# Altium PCB 主板-双BH(1).PcbDoc (part 5 of 13)
Units mm, origin at the board's own origin, x right, y up, seen from the top; angles counter-clockwise.
Board outline 97.69 x 103.45 mm, 2 copper layers (Top Layer, Bottom Layer); 78 components, 75 nets, 243 pads, 279 vias.
Unrouted connection lines stored in the file: 7.
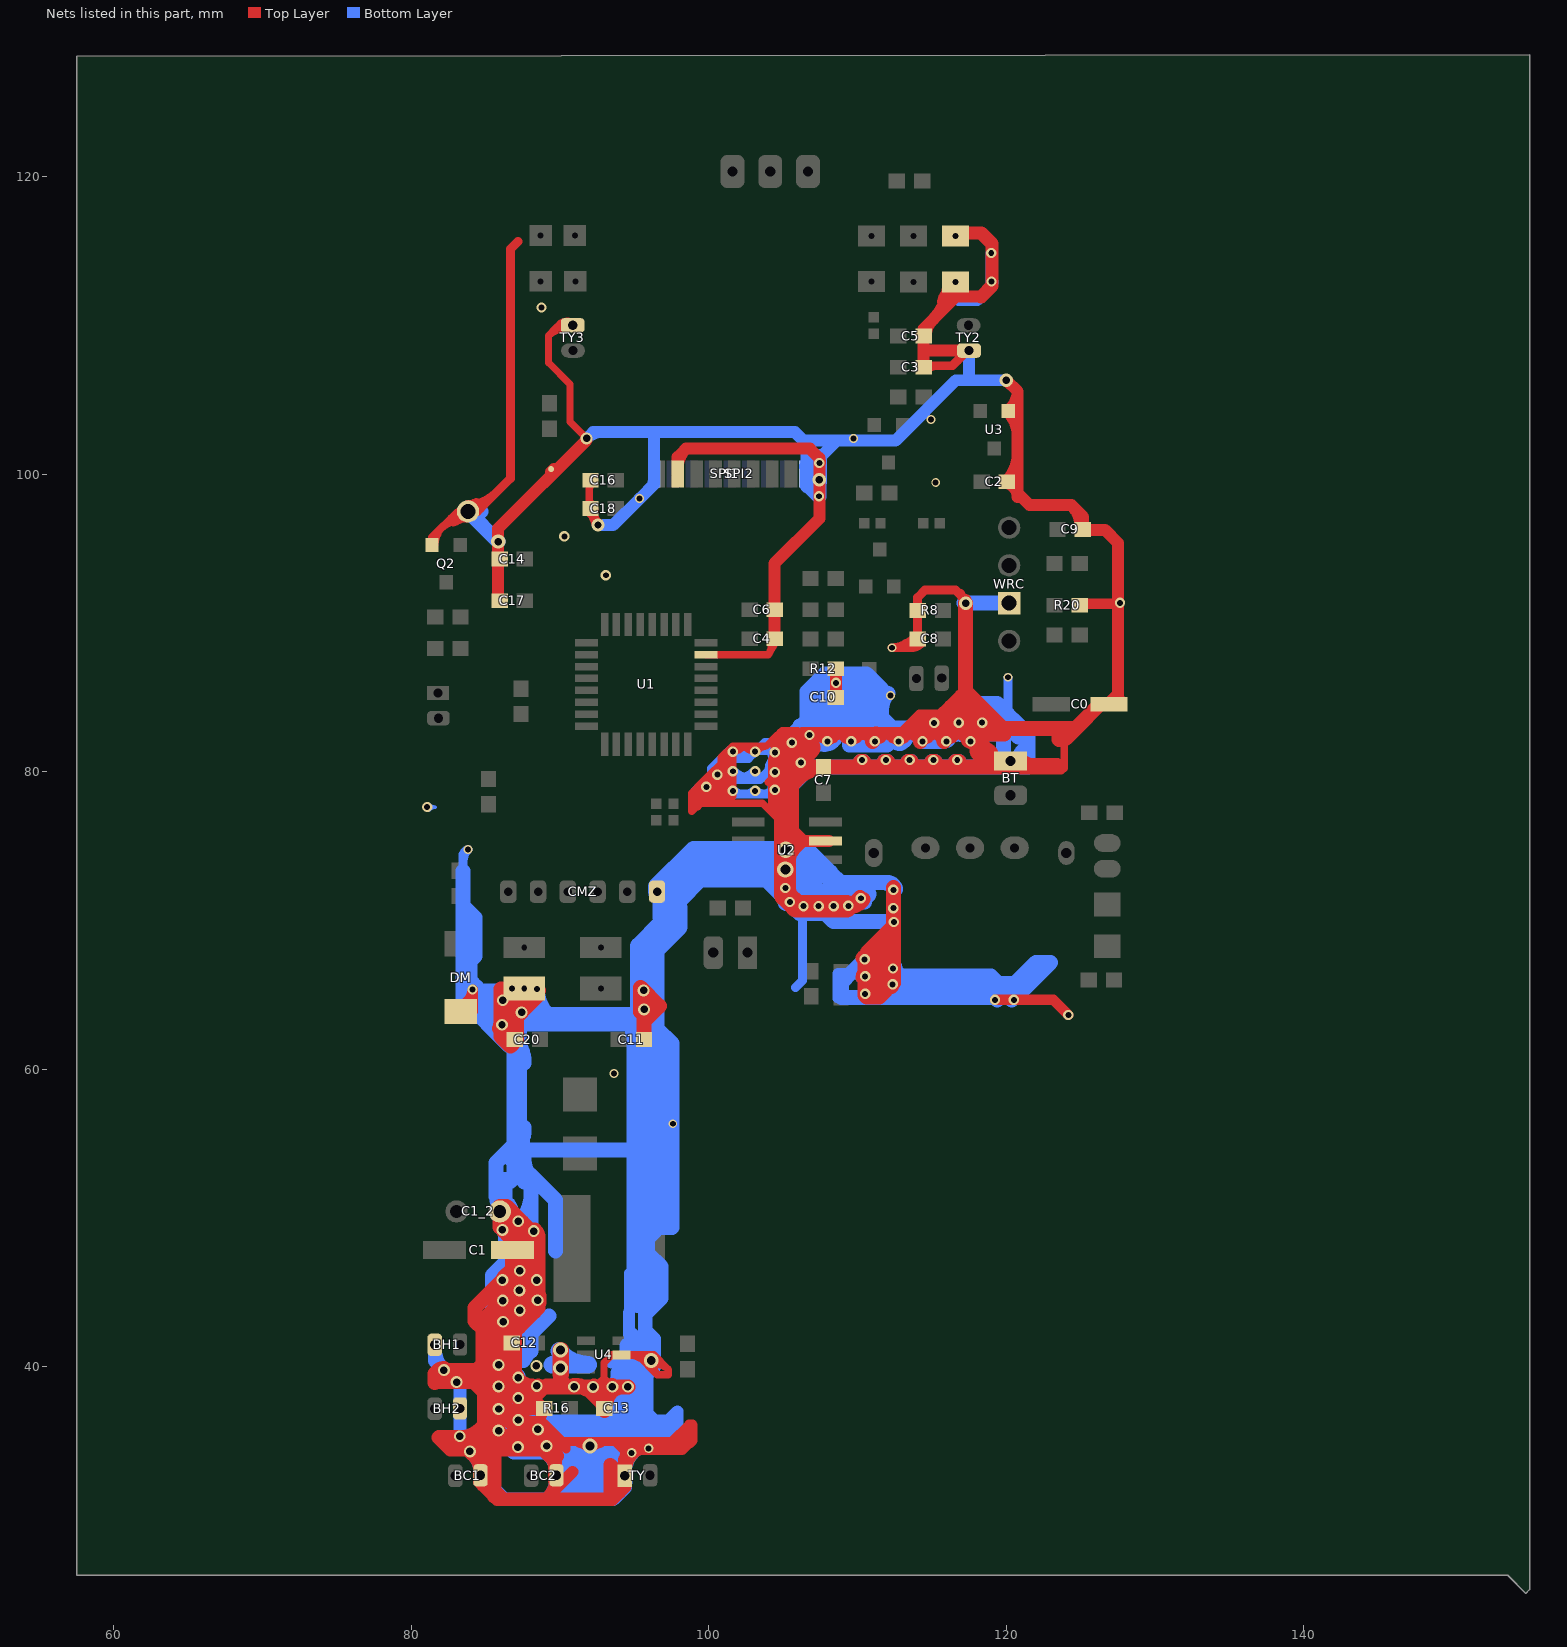
[diagram p5: the nets of this part, all layers, seen from the top]

## Via types
v1: diameter 0.7, hole 0.4, Top Layer to Bottom Layer, 108 vias
v2: diameter 0.68, hole 0.4, Top Layer to Bottom Layer, 87 vias
v3: diameter 0.8, hole 0.5, Top Layer to Bottom Layer, tented both sides, 33 vias
v4: diameter 0.6, hole 0.4, Top Layer to Bottom Layer, 12 vias
v5: diameter 0.9, hole 0.5, Top Layer to Bottom Layer, 8 vias
v6: diameter 0.8, hole 0.5, Top Layer to Bottom Layer, 6 vias
v7: diameter 1, hole 0.75, Top Layer to Bottom Layer, tented both sides, 5 vias
v8: diameter 3.4, hole 2.9, Top Layer to Bottom Layer, 4 vias
v9: diameter 1, hole 0.6, Top Layer to Bottom Layer, tented both sides, 3 vias
v10: diameter 1, hole 0.56, Top Layer to Bottom Layer, tented both sides, 2 vias
v11: diameter 1.1, hole 0.68, Top Layer to Bottom Layer, 2 vias
v12: diameter 0.8, hole 0.4, Top Layer to Bottom Layer, 2 vias
v13: diameter 0.65, hole 0.4, Top Layer to Bottom Layer, tented both sides, 2 vias
v14: diameter 1, hole 0.6, Top Layer to Bottom Layer, tented bottom, 1 vias
v15: diameter 0.7, hole 0.4, Top Layer to Bottom Layer, tented bottom, 1 vias
v16: diameter 0.95, hole 0.5, Top Layer to Bottom Layer, 1 vias
v17: diameter 0.64, hole 0.4, Top Layer to Bottom Layer, 1 vias
v18: diameter 0.62, hole 0.4, Top Layer to Bottom Layer, 1 vias

## Nets (pads, with @x,y where several pads share a name; then routed paths per layer and width w, separated by ;. In a path a pad name is that pad's centre, name@x,y a point inside that pad or via, vN(x,y) a via of type N, cw(c..) or ccw(c..) an arc to the next point about the centre after c; other vN are vias at no path point) (continued)
GND: (continued)
  Top Layer w0.5: Q2.2@81.382,95.25 81.382,95.758 ; Q2.2@81.59,95.336 cw(c82.088,95.497) 81.718,95.866 ; pad.4@83.339,97.375 cw(c82.878,97.245) 83.216,96.907 cw(c83.555,96.569) pad.4@83.684,97.029 ; pad.4@84.201,97.434 83.058,97.434 ; 89.856,109.74 cw(c90.201,109.328) TY3.2@90.435,109.812 ; 90.221,38.811 90.221,39.227 ; TY3.2@90.855,109.919 89.826,109.919 ; v6(91.796,102.413) 90.678,103.53 90.678,106.07 89.23,107.518 89.23,109.323 ; v6@91.992,38.412 v6(92.227,38.647) 92.368,38.647 92.964,39.243 93.523,38.684 93.523,38.649 94.123,38.649 C13.2@92.939,37.465 ; C16.1@92.05,99.6 91.973,99.523 91.973,97.379 v5@92.558,96.795 ; C18.1@92.246,97.305 ccw(c93.099,97.534) v5@92.658,96.769 ; 92.261,97.046 cw(c92.075,96.787) v5@92.372,96.67 ; C18.1@92.269,97.223 ccw(c92.932,97.4) v5@92.642,96.777 ; C18.1@92.318,97.577 ccw(c92.803,97.305) 92.321,97.027 ; v5(92.558,96.596) v5@92.558,96.795 ; 92.95,38.643 92.964,38.643 92.964,40.272 93.496,40.804 96.305,40.804 97.296,39.813 ; 93.336,38.215 ccw(c93.066,38.445) v6@93.387,38.595 ; 94.121,38.42 cw(c94.398,38.143) v6@94.518,38.516 ; U4.2@94.539,40.767 95.25,40.767 ; v1@99.799,79.081 ccw(c99.52,79.58) 100.069,79.424 ; v1@99.8,79.082 ccw(c99.53,79.586) 100.077,79.42 ; v1@99.947,78.987 cw(c100.517,78.947) 100.142,79.378 ; 99.949,78.435 99.822,78.308 ; 104.013,79.299 104.242,79.527 ; 104.369,80.366 104.391,80.366 ; 104.572,82.423 104.496,82.347 ; 104.648,72.252 104.648,76.86 104.47,77.038 ; v1(105.588,81.966) 105.379,82.123 105.13,82.372 104.826,82.677 ; 116.459,82.779 117.831,82.779 ; 118.059,82.525 116.205,82.525 ; 118.059,82.537 116.218,82.537 ; 120.498,80.061 123.723,80.061 123.901,80.239 123.901,81.813 123.546,82.169 ; 124.003,82.245 124.003,82.525 124.003,82.753 124.117,82.639 ; 124.231,82.525 124.117,82.639 ; C0.2@126.924,84.633 C0.2@126.913,84.622 ; Q2.2@81.3,95.448 ccw(c80.729,96.438) 81.832,96.142 ; Q2.2@81.3,95.448 ccw(c80.729,96.438) 81.832,96.142 ; Q2.2@81.3,95.448 ccw(c80.729,96.438) 81.832,96.142 ; 81.382,95.758 ccw(c81.825,95.758) Q2.2@81.532,95.425 ; 81.382,95.758 ccw(c81.825,95.758) Q2.2@81.532,95.425 ; 81.382,95.758 ccw(c81.825,95.758) Q2.2@81.532,95.425 ; 81.382,95.758 83.058,97.434 ; Q2.2@81.6,95.275 cw(c83.293,95.275) 82.096,96.472 ; Q2.2@81.6,95.275 cw(c83.293,95.275) 82.096,96.472 ; Q2.2@81.6,95.275 cw(c83.293,95.275) 82.096,96.472 ; 81.796,96.172 cw(c83.82,94.148) pad.4@83.82,97.011 ; 81.796,96.172 cw(c83.82,94.148) pad.4@83.82,97.011 ; 81.796,96.172 cw(c83.82,94.148) pad.4@83.82,97.011 ; 82.649,97.026 cw(c83.82,95.855) pad.4@83.82,97.511 ; 82.649,97.026 cw(c83.82,95.855) pad.4@83.82,97.511 ; 82.649,97.026 cw(c83.82,95.855) pad.4@83.82,97.511 ; 82.819,96.742 ccw(c82.392,98.335) pad.4@83.82,97.511 ; 82.819,96.742 ccw(c82.392,98.335) pad.4@83.82,97.511 ; 82.819,96.742 ccw(c82.392,98.335) pad.4@83.82,97.511 ; 82.992,97.289 ccw(c82.867,97.757) pad.4@83.336,97.636 ; 82.992,97.289 cw(c83.118,96.821) pad.4@83.463,97.16 ; 82.992,97.289 ccw(c82.867,97.757) pad.4@83.336,97.636 ; 82.992,97.289 cw(c83.118,96.821) pad.4@83.463,97.16 ; 82.992,97.289 ccw(c82.867,97.757) pad.4@83.336,97.636 ; 82.992,97.289 cw(c83.118,96.821) pad.4@83.463,97.16 ; 83.058,97.434 ccw(c83.058,97.726) pad.4@83.339,97.647 ; 83.058,97.434 cw(c83.058,97.038) pad.4@83.395,97.247 ; 83.058,97.434 ccw(c83.058,97.726) pad.4@83.339,97.647 ; 83.058,97.434 cw(c83.058,97.038) pad.4@83.395,97.247 ; 83.058,97.434 ccw(c83.058,97.726) pad.4@83.339,97.647 ; 83.058,97.434 cw(c83.058,97.038) pad.4@83.395,97.247 ; 89.23,109.323 cw(c90.373,108.181) TY3.2@90.515,109.79 ; 89.23,109.323 cw(c90.373,108.181) TY3.2@90.515,109.79 ; 89.23,109.323 cw(c90.373,108.181) TY3.2@90.515,109.79 ; 89.23,109.323 89.826,109.919 ; 89.499,109.612 ccw(c89.272,110.906) TY3.2@90.347,110.151 ; 89.499,109.612 ccw(c89.272,110.906) TY3.2@90.347,110.151 ; 89.499,109.612 ccw(c89.272,110.906) TY3.2@90.347,110.151 ; 89.826,109.919 ccw(c89.826,110.616) TY3.2@90.36,110.167 ; 89.826,109.919 ccw(c89.826,110.616) TY3.2@90.36,110.167 ; 89.826,109.919 ccw(c89.826,110.616) TY3.2@90.36,110.167 ; v9@89.866,39.752 cw(c89.01,38.896) 90.221,38.896 ; v9@89.866,39.752 cw(c89.01,38.896) 90.221,38.896 ; v9@89.866,39.752 cw(c89.01,38.896) 90.221,38.896 ; v9@89.922,39.71 cw(c89.645,39.205) 90.221,39.205 ; v9@89.922,39.71 cw(c89.645,39.205) 90.221,39.205 ; v9@89.922,39.71 cw(c89.645,39.205) 90.221,39.205 ; 89.987,110.08 cw(c90.496,109.572) TY3.2@90.559,110.288 ; 89.987,110.08 cw(c90.496,109.572) TY3.2@90.559,110.288 ; 89.987,110.08 cw(c90.496,109.572) TY3.2@90.559,110.288 ; 90.11,39.33 cw(c90.375,39.483) v9@90.192,39.728 ; 90.11,39.33 cw(c90.375,39.483) v9@90.192,39.728 ; 90.11,39.33 cw(c90.375,39.483) v9@90.192,39.728 ; 90.221,39.227 cw(c90.484,39.49) v9@90.22,39.752 ; 90.221,39.227 cw(c90.484,39.49) v9@90.22,39.752 ; 90.221,39.227 cw(c90.484,39.49) v9@90.22,39.752 ; 90.221,39.227 90.51,38.938 ; v9@90.282,39.855 ccw(c91.158,39.586) 90.51,38.938 ; v9@90.282,39.855 ccw(c91.158,39.586) 90.51,38.938 ; v9@90.282,39.855 ccw(c91.158,39.586) 90.51,38.938 ; 90.414,39.034 ccw(c90.957,39.577) v6@90.957,38.809 ; 90.414,39.034 ccw(c90.957,39.577) v6@90.957,38.809 ; 90.414,39.034 ccw(c90.957,39.577) v6@90.957,38.809 ; 90.51,38.938 ccw(c90.846,39.275) v6@90.931,38.806 ; 90.51,38.938 ccw(c90.846,39.275) v6@90.931,38.806 ; 90.51,38.938 ccw(c90.846,39.275) v6@90.931,38.806 ; C18.1@91.823,97.877 ccw(c91.461,98.239) 91.973,98.239 ; C18.1@91.823,97.877 ccw(c91.461,98.239) 91.973,98.239 ; C18.1@91.823,97.877 ccw(c91.461,98.239) 91.973,98.239 ; C16.1@91.823,99.423 cw(c91.461,99.061) 91.973,99.061 ; C16.1@91.823,99.423 cw(c91.461,99.061) 91.973,99.061 ; C16.1@91.823,99.423 cw(c91.461,99.061) 91.973,99.061 ; 91.973,98.368 ccw(c92.668,98.368) C18.1@92.177,97.877 ; 91.973,98.368 ccw(c92.668,98.368) C18.1@92.177,97.877 ; 91.973,98.368 ccw(c92.668,98.368) C18.1@92.177,97.877 ; 91.973,98.932 cw(c92.668,98.932) C16.1@92.177,99.423 ; 91.973,98.932 cw(c92.668,98.932) C16.1@92.177,99.423 ; 91.973,98.932 cw(c92.668,98.932) C16.1@92.177,99.423 ; C18.1@92.076,97.277 cw(c91.395,96.596) v5@92.358,96.596 ; C18.1@92.076,97.277 cw(c91.395,96.596) v5@92.358,96.596 ; C18.1@92.076,97.277 cw(c91.395,96.596) v5@92.358,96.596 ; C18.1@92.17,97.288 ccw(c92.89,97.481) v5@92.628,96.783 ; C18.1@92.17,97.288 ccw(c92.89,97.481) v5@92.628,96.783 ; C18.1@92.17,97.288 ccw(c92.89,97.481) v5@92.628,96.783 ; C18.1@92.17,97.288 ccw(c92.89,97.481) v5@92.628,96.783 ; v6@92.227,38.797 ccw(c92.227,39.499) 92.724,39.003 ; v6@92.227,38.797 ccw(c92.227,39.499) 92.724,39.003 ; v6@92.227,38.797 ccw(c92.227,39.499) 92.724,39.003 ; 92.258,96.962 cw(c92.713,97.225) C18.1@92.298,97.547 ; 92.258,96.962 cw(c92.713,97.225) C18.1@92.298,97.547 ; 92.258,96.962 cw(c92.713,97.225) C18.1@92.298,97.547 ; C18.1@92.34,97.631 ccw(c93.161,97.398) v5@92.558,96.795 ; C18.1@92.34,97.631 ccw(c93.161,97.398) v5@92.558,96.795 ; C18.1@92.34,97.631 ccw(c93.161,97.398) v5@92.558,96.795 ; 92.366,97.127 cw(c91.962,96.894) v5@92.379,96.686 ; 92.366,97.127 cw(c91.962,96.894) v5@92.379,96.686 ; 92.366,97.127 cw(c91.962,96.894) v5@92.379,96.686 ; 92.366,97.127 cw(c91.962,96.894) v5@92.379,96.686 ; 92.366,97.127 cw(c91.962,96.894) v5@92.379,96.686 ; 92.366,97.127 cw(c91.962,96.894) v5@92.379,96.686 ; C13.2@92.939,37.465 ccw(c91.878,38.526) v6@93.373,38.647 ; C13.2@92.939,37.465 ccw(c91.878,38.526) v6@93.373,38.647 ; C13.2@92.939,37.465 ccw(c91.878,38.526) v6@93.373,38.647 ; 93.123,38.643 ccw(c93.123,39.059) v6@93.417,38.765 ; 93.123,38.643 ccw(c93.123,39.059) v6@93.417,38.765 ; 93.123,38.643 ccw(c93.123,39.059) v6@93.417,38.765 ; 93.123,38.643 ccw(c93.123,39.059) v6@93.417,38.765 ; 93.123,38.643 ccw(c93.123,39.059) v6@93.417,38.765 ; 93.123,38.643 ccw(c93.123,39.059) v6@93.417,38.765 ; 93.249,38.958 cw(c92.949,38.659) v6@93.373,38.659 ; 93.249,38.958 cw(c92.949,38.659) v6@93.373,38.659 ; 93.249,38.958 cw(c92.949,38.659) v6@93.373,38.659 ; C13.2@93.251,37.316 cw(c93.909,37.661) 93.266,38.032 ; C13.2@93.251,37.316 cw(c93.909,37.661) 93.266,38.032 ; C13.2@93.251,37.316 cw(c93.909,37.661) 93.266,38.032 ; 93.252,37.985 cw(c94.095,37.83) v6@93.608,38.535 ; 93.252,37.985 cw(c94.095,37.83) v6@93.608,38.535 ; 93.252,37.985 cw(c94.095,37.83) v6@93.608,38.535 ; C13.2@93.28,37.2 cw(c94.744,37.2) 93.709,38.235 ; C13.2@93.28,37.2 cw(c94.744,37.2) 93.709,38.235 ; C13.2@93.28,37.2 cw(c94.744,37.2) 93.709,38.235 ; 93.571,38.097 cw(c94.564,37.104) v6@94.564,38.509 ; 93.571,38.097 cw(c94.564,37.104) v6@94.564,38.509 ; 93.571,38.097 cw(c94.564,37.104) v6@94.564,38.509 ; 93.704,38.23 ccw(c93.293,38.64) v6@93.872,38.687 ; 93.704,38.23 ccw(c93.293,38.64) v6@93.872,38.687 ; 93.704,38.23 ccw(c93.293,38.64) v6@93.872,38.687 ; 93.914,38.335 ccw(c93.692,39.162) v6@94.434,38.734 ; 93.914,38.335 ccw(c93.692,39.162) v6@94.434,38.734 ; 93.914,38.335 ccw(c93.692,39.162) v6@94.434,38.734 ; U4.2@94.588,40.804 cw(c94.588,38.86) v14@95.962,40.235 ; U4.2@94.588,40.804 cw(c94.588,38.86) v14@95.962,40.235 ; U4.2@94.588,40.804 cw(c94.588,38.86) v14@95.962,40.235 ; 95.212,40.668 ccw(c95.651,41.429) v14@96.031,40.637 ; 95.212,40.668 ccw(c95.651,41.429) v14@96.031,40.637 ; 95.212,40.668 ccw(c95.651,41.429) v14@96.031,40.637 ; 95.25,40.767 ccw(c95.732,41.249) v14@96.03,40.636 ; 95.25,40.767 ccw(c95.732,41.249) v14@96.03,40.636 ; 95.25,40.767 ccw(c95.732,41.249) v14@96.03,40.636 ; 95.25,40.767 96.545,39.472 ; 95.795,40.804 cw(c95.795,40.067) v14@96.316,40.588 ; 95.795,40.804 cw(c95.795,40.067) v14@96.316,40.588 ; 95.795,40.804 cw(c95.795,40.067) v14@96.316,40.588 ; v14@96.09,40.166 cw(c96.034,39.887) 96.316,39.854 ; v14@96.09,40.166 cw(c96.034,39.887) 96.316,39.854 ; v14@96.09,40.166 cw(c96.034,39.887) 96.316,39.854 ; v14@96.182,40.165 cw(c96.401,38.918) 97.296,39.813 ; v14@96.182,40.165 cw(c96.401,38.918) 97.296,39.813 ; v14@96.182,40.165 cw(c96.401,38.918) 97.296,39.813 ; v14@96.371,40.319 ccw(c97.101,40.027) 96.545,39.472 ; v14@96.371,40.319 ccw(c97.101,40.027) 96.545,39.472 ; v14@96.371,40.319 ccw(c97.101,40.027) 96.545,39.472 ; 96.545,39.472 97.296,39.472 97.296,39.813 ; 98.857,78.562 cw(c99.683,77.736) v1@99.834,78.895 ; 98.857,78.562 cw(c99.683,77.736) v1@99.834,78.895 ; 98.857,78.562 cw(c99.683,77.736) v1@99.834,78.895 ; 98.857,78.562 98.857,77.343 99.416,77.902 ; 98.857,78.562 100.838,80.543 ; 99.263,77.642 cw(c100.841,77.642) v1@99.907,78.913 ; 99.263,77.642 cw(c100.841,77.642) v1@99.907,78.913 ; 99.263,77.642 cw(c100.841,77.642) v1@99.907,78.913 ; 99.39,78.836 ccw(c99.314,79.402) v1@99.768,79.055 ; 99.39,78.836 ccw(c99.314,79.402) v1@99.768,79.055 ; 99.39,78.836 ccw(c99.314,79.402) v1@99.768,79.055 ; 99.416,77.82 cw(c100.878,77.82) v1@99.913,78.919 ; 99.416,77.82 cw(c100.878,77.82) v1@99.913,78.919 ; 99.416,77.82 cw(c100.878,77.82) v1@99.913,78.919 ; 99.416,77.902 103.607,77.902 104.242,77.267 ; 99.416,77.902 99.416,78.765 ; 99.416,77.902 99.289,77.775 99.263,77.775 99.263,78.99 101.397,81.124 101.397,80.747 ; 99.416,77.902 99.822,78.308 ; 99.416,78.765 cw(c99.747,78.434) v1@99.83,78.896 ; 99.416,78.765 cw(c99.747,78.434) v1@99.83,78.896 ; 99.416,78.765 cw(c99.747,78.434) v1@99.83,78.896 ; 99.416,78.765 101.397,80.747 ; 99.553,79.28 cw(c100.584,78.248) v1@100.584,79.707 ; 99.553,79.28 cw(c100.584,78.248) v1@100.584,79.707 ; 99.553,79.28 cw(c100.584,78.248) v1@100.584,79.707 ; 99.589,79.295 cw(c100.584,78.3) v1@100.584,79.707 ; 99.589,79.295 cw(c100.584,78.3) v1@100.584,79.707 ; 99.589,79.295 cw(c100.584,78.3) v1@100.584,79.707 ; 99.626,78.563 ccw(c99.18,78.92) v1@99.748,78.983 ; 99.626,78.563 ccw(c99.18,78.92) v1@99.748,78.983 ; 99.626,78.563 ccw(c99.18,78.92) v1@99.748,78.983 ; 99.664,78.546 ccw(c99.189,78.863) v1@99.749,78.974 ; 99.664,78.546 ccw(c99.189,78.863) v1@99.749,78.974 ; 99.664,78.546 ccw(c99.189,78.863) v1@99.749,78.974 ; 99.67,78.323 cw(c100.518,78.323) v1@99.918,78.923 ; 99.67,78.323 cw(c100.518,78.323) v1@99.918,78.923 ; 99.67,78.323 cw(c100.518,78.323) v1@99.918,78.923 ; 99.726,78.591 ccw(c99.359,78.803) v1@99.754,78.958 ; 99.726,78.591 ccw(c99.359,78.803) v1@99.754,78.958 ; 99.726,78.591 ccw(c99.359,78.803) v1@99.754,78.958 ; v1@99.797,79.081 ccw(c99.512,79.575) 100.064,79.427 ; v1@99.797,79.081 ccw(c99.512,79.575) 100.064,79.427 ; v1@99.797,79.081 ccw(c99.512,79.575) 100.064,79.427 ; v1@99.797,79.081 ccw(c99.512,79.575) 100.064,79.427 ; v1@99.797,79.081 ccw(c99.512,79.575) 100.064,79.427 ; v1@99.797,79.081 ccw(c99.512,79.575) 100.064,79.427 ; v1@99.797,79.081 ccw(c99.512,79.575) 100.064,79.427 ; v1@99.797,79.081 ccw(c99.512,79.575) 100.064,79.427 ; v1@99.797,79.081 ccw(c99.512,79.575) 100.064,79.427 ; v1@99.797,79.081 ccw(c99.512,79.575) 100.064,79.427 ; v1@99.797,79.081 ccw(c99.512,79.575) 100.064,79.427 ; v1@99.804,79.084 ccw(c99.194,80.336) v1@100.51,79.882 ; v1@99.804,79.084 ccw(c99.194,80.336) v1@100.51,79.882 ; v1@99.804,79.084 ccw(c99.194,80.336) v1@100.51,79.882 ; 99.822,78.308 99.67,78.308 99.67,78.816 v1(99.847,78.994) 100.892,80.038 101.117,79.812 101.117,79.731 ; 99.822,78.308 101.575,78.308 101.629,78.363 v1(101.629,78.715) v1(101.629,80.038) 101.629,80.979 101.397,80.747 ; v1@99.871,78.897 cw(c100.003,78.341) 100.302,78.828 ; v1@99.871,78.897 cw(c100.003,78.341) 100.302,78.828 ; v1@99.871,78.897 cw(c100.003,78.341) 100.302,78.828 ; v1@99.883,79.087 ccw(c100.135,79.748) 100.635,79.248 ; v1@99.883,79.087 ccw(c100.135,79.748) 100.635,79.248 ; v1@99.883,79.087 ccw(c100.135,79.748) 100.635,79.248 ; v1@99.914,79.254 cw(c100.713,78.793) v1@100.597,79.708 ; v1@99.914,79.254 cw(c100.713,78.793) v1@100.597,79.708 ; v1@99.914,79.254 cw(c100.713,78.793) v1@100.597,79.708 ; v1@99.914,79.254 cw(c100.713,78.793) v1@100.597,79.708 ; v1@99.914,79.254 cw(c100.713,78.793) v1@100.597,79.708 ; v1@99.914,79.254 cw(c100.713,78.793) v1@100.597,79.708 ; v1@99.914,79.265 cw(c100.69,78.817) v1@100.595,79.707 ; v1@99.914,79.265 cw(c100.69,78.817) v1@100.595,79.707 ; v1@99.914,79.265 cw(c100.69,78.817) v1@100.595,79.707 ; v1@99.914,79.265 cw(c100.69,78.817) v1@100.595,79.707 ; v1@99.914,79.265 cw(c100.69,78.817) v1@100.595,79.707 ; v1@99.914,79.265 cw(c100.69,78.817) v1@100.595,79.707 ; v1@99.92,79.063 ccw(c100.965,80.052) 100.965,78.613 ; v1@99.92,79.063 ccw(c100.965,80.052) 100.965,78.613 ; v1@99.92,79.063 ccw(c100.965,80.052) 100.965,78.613 ; v1@99.947,78.991 cw(c100.883,78.961) v1@100.415,79.771 ; v1@99.947,78.991 cw(c100.883,78.961) v1@100.415,79.771 ; v1@99.947,78.991 cw(c100.883,78.961) v1@100.415,79.771 ; v1@99.947,78.993 cw(c100.86,78.98) v1@100.404,79.771 ; v1@99.947,78.993 cw(c100.86,78.98) v1@100.404,79.771 ; v1@99.947,78.993 cw(c100.86,78.98) v1@100.404,79.771 ; v1@99.947,78.994 cw(c100.679,78.994) 100.162,79.512 ; v1@99.947,78.994 cw(c101.538,78.994) 100.413,80.119 ; v1@99.947,78.994 cw(c101.59,78.994) 100.429,80.156 ; v1@99.947,78.994 cw(c100.655,78.994) 100.155,79.495 ; v1@99.947,78.994 cw(c100.681,78.994) 100.162,79.513 ; v1@99.947,78.994 cw(c100.679,78.994) 100.162,79.512 ; v1@99.947,78.994 cw(c101.538,78.994) 100.413,80.119 ; v1@99.947,78.994 cw(c101.59,78.994) 100.429,80.156 ; v1@99.947,78.994 cw(c100.655,78.994) 100.155,79.495 ; v1@99.947,78.994 cw(c100.681,78.994) 100.162,79.513 ; v1@99.947,78.994 cw(c100.655,78.994) 100.155,79.495 ; v1@99.947,78.994 cw(c100.681,78.994) 100.162,79.513 ; v1@99.947,78.994 cw(c100.655,78.994) 100.155,79.495 ; v1@99.947,78.994 cw(c100.681,78.994) 100.162,79.513 ; v1@99.947,78.994 cw(c100.679,78.994) 100.162,79.512 ; v1@99.947,78.994 cw(c101.538,78.994) 100.413,80.119 ; v1@99.947,78.994 cw(c101.59,78.994) 100.429,80.156 ; 100,78.613 ccw(c98.831,79.782) v1@100.484,79.805 ; 100,78.613 ccw(c98.831,79.782) v1@100.484,79.805 ; 100,78.613 ccw(c98.831,79.782) v1@100.484,79.805 ; 100,78.613 100.965,78.613 ; 100,78.613 100.635,79.248 ; 100.151,79.591 ccw(c100.003,80.142) v1@100.497,79.857 ; 100.151,79.591 ccw(c100.003,80.142) v1@100.497,79.857 ; 100.151,79.591 ccw(c100.003,80.142) v1@100.497,79.857 ; 100.151,79.591 ccw(c100.003,80.142) v1@100.497,79.857 ; 100.151,79.591 ccw(c100.003,80.142) v1@100.497,79.857 ; 100.151,79.591 ccw(c100.003,80.142) v1@100.497,79.857 ; 100.167,79.534 cw(c100.584,79.117) v1@100.584,79.707 ; 100.167,79.534 cw(c100.584,79.117) v1@100.584,79.707 ; 100.167,79.534 cw(c100.584,79.117) v1@100.584,79.707 ; 100.167,79.534 cw(c100.584,79.117) v1@100.584,79.707 ; 100.176,79.546 ccw(c99.97,80.079) v1@100.493,79.847 ; 100.176,79.546 ccw(c99.97,80.079) v1@100.493,79.847 ; 100.176,79.546 ccw(c99.97,80.079) v1@100.493,79.847 ; 100.176,79.546 ccw(c99.97,80.079) v1@100.493,79.847 ; 100.181,79.538 ccw(c99.965,80.067) v1@100.492,79.846 ; 100.181,79.538 ccw(c99.965,80.067) v1@100.492,79.846 ; 100.181,79.538 ccw(c99.965,80.067) v1@100.492,79.846 ; 100.181,79.538 ccw(c99.965,80.067) v1@100.492,79.846 ; 100.185,79.541 cw(c100.584,79.142) v1@100.584,79.707 ; 100.185,79.541 cw(c100.584,79.142) v1@100.584,79.707 ; 100.185,79.541 cw(c100.584,79.142) v1@100.584,79.707 ; 100.185,79.541 cw(c100.584,79.142) v1@100.584,79.707 ; 100.196,79.546 cw(c100.584,79.159) v1@100.584,79.707 ; 100.196,79.546 cw(c100.584,79.159) v1@100.584,79.707 ; 100.196,79.546 cw(c100.584,79.159) v1@100.584,79.707 ; 100.224,79.458 cw(c100.716,79.127) v1@100.603,79.709 ; 100.224,79.458 cw(c100.716,79.127) v1@100.603,79.709 ; 100.224,79.458 cw(c100.716,79.127) v1@100.603,79.709 ; 100.224,79.458 cw(c100.716,79.127) v1@100.603,79.709 ; 100.359,79.506 ccw(c100.059,79.807) v1@100.484,79.807 ; 100.359,79.506 ccw(c100.059,79.807) v1@100.484,79.807 ; 100.359,79.506 ccw(c100.059,79.807) v1@100.484,79.807 ; 100.374,79.37 cw(c100.928,79.23) v1@100.635,79.721 ; 100.374,79.37 cw(c100.928,79.23) v1@100.635,79.721 ; 100.374,79.37 cw(c100.928,79.23) v1@100.635,79.721 ; 100.407,78.308 ccw(c100.407,79.937) v1@101.558,78.785 ; 100.407,78.308 ccw(c100.407,79.937) v1@101.558,78.785 ; 100.407,78.308 ccw(c100.407,79.937) v1@101.558,78.785 ; v1@100.513,79.736 cw(c100.22,79.443) 100.635,79.443 ; v1@100.513,79.736 cw(c100.22,79.443) 100.635,79.443 ; v1@100.513,79.736 cw(c100.22,79.443) 100.635,79.443 ; v1@100.513,79.736 cw(c100.22,79.443) 100.635,79.443 ; v1@100.513,79.736 cw(c100.22,79.443) 100.635,79.443 ; v1@100.513,79.736 cw(c100.22,79.443) 100.635,79.443 ; v1@100.529,79.723 cw(c99.82,78.637) 101.117,78.637 ; v1@100.529,79.723 cw(c99.82,78.637) 101.117,78.637 ; v1@100.529,79.723 cw(c99.82,78.637) 101.117,78.637 ; v1@100.534,79.893 ccw(c100.248,80.388) 100.8,80.24 ; v1@100.534,79.893 ccw(c100.248,80.388) 100.8,80.24 ; v1@100.534,79.893 ccw(c100.248,80.388) 100.8,80.24 ; v1@100.584,79.907 ccw(c100.584,80.332) 100.885,80.031 ; v1@100.584,79.907 ccw(c100.584,80.332) 100.885,80.031 ; v1@100.584,79.907 ccw(c100.584,80.332) 100.885,80.031 ; 100.635,79.248 100.635,78.943 100.965,78.613 ; 100.635,79.248 101.117,79.731 ; v1@100.64,79.89 ccw(c100.951,80.355) v1@101.346,79.959 ; v1@100.64,79.89 ccw(c100.951,80.355) v1@101.346,79.959 ; v1@100.64,79.89 ccw(c100.951,80.355) v1@101.346,79.959 ; v1@100.678,79.84 cw(c101.316,80.065) 100.838,80.543 ; v1@100.678,79.84 cw(c101.316,80.065) 100.838,80.543 ; v1@100.678,79.84 cw(c101.316,80.065) 100.838,80.543 ; v1@100.684,79.801 ccw(c101.254,79.77) 100.829,79.389 ; v1@100.684,79.801 ccw(c101.254,79.77) 100.829,79.389 ; v1@100.684,79.801 ccw(c101.254,79.77) 100.829,79.389 ; v1@100.684,79.807 cw(c101.232,79.807) 100.845,80.194 ; v1@100.684,79.807 cw(c102.143,79.807) 101.111,80.838 ; v1@100.684,79.807 cw(c101.232,79.807) 100.845,80.194 ; v1@100.684,79.807 cw(c102.143,79.807) 101.111,80.838 ; v1@100.684,79.807 cw(c101.232,79.807) 100.845,80.194 ; v1@100.684,79.807 cw(c102.143,79.807) 101.111,80.838 ; 100.838,80.543 100.838,80.975 ; 100.838,80.975 cw(c101.528,80.285) v1@101.62,81.257 ; 100.838,80.975 cw(c101.528,80.285) v1@101.62,81.257 ; 100.838,80.975 cw(c101.528,80.285) v1@101.62,81.257 ; 100.838,80.975 101.6,81.737 103.886,81.737 ; 100.965,78.613 cw(c101.279,78.299) v1@101.565,78.638 ; 100.965,78.613 cw(c101.279,78.299) v1@101.565,78.638 ; 100.965,78.613 cw(c101.279,78.299) v1@101.565,78.638 ; 100.965,78.613 101.117,78.765 101.117,79.731 ; 100.965,78.613 101.117,78.461 ; 101.11,79.723 cw(c101.629,79.204) v1@101.629,79.938 ; 101.11,79.723 cw(c101.629,79.204) v1@101.629,79.938 ; 101.11,79.723 cw(c101.629,79.204) v1@101.629,79.938 ; 101.117,78.461 ccw(c101.117,78.908) v1@101.536,78.75 ; 101.117,78.461 ccw(c101.117,78.908) v1@101.536,78.75 ; 101.117,78.461 ccw(c101.117,78.908) v1@101.536,78.75 ; 101.117,78.461 101.346,78.461 v1@101.346,79.959 ; 101.117,78.666 cw(c102.861,78.666) v1@101.696,79.964 ; 101.117,78.666 cw(c102.861,78.666) v1@101.696,79.964 ; 101.117,78.666 cw(c102.861,78.666) v1@101.696,79.964 ; 101.117,79.731 cw(c101.619,79.229) v1@101.628,79.938 ; 101.117,79.731 cw(c101.619,79.229) v1@101.628,79.938 ; 101.117,79.731 ccw(c102.167,79.731) v1@101.676,78.803 ; 101.117,79.731 cw(c101.619,79.229) v1@101.628,79.938 ; 101.117,79.731 cw(c101.619,79.229) v1@101.628,79.938 ; 101.117,79.731 ccw(c102.167,79.731) v1@101.676,78.803 ; 101.117,79.731 cw(c101.619,79.229) v1@101.628,79.938 ; 101.117,79.731 cw(c101.619,79.229) v1@101.628,79.938 ; 101.117,79.731 ccw(c102.167,79.731) v1@101.676,78.803 ; 101.117,79.731 v1@101.346,79.959 ; 101.17,78.561 cw(c101.455,78.066) v1@101.603,78.618 ; 101.17,78.561 cw(c101.455,78.066) v1@101.603,78.618 ; 101.17,78.561 cw(c101.455,78.066) v1@101.603,78.618 ; 101.177,81.182 ccw(c101.082,81.745) v1@101.548,81.414 ; 101.177,81.182 ccw(c101.082,81.745) v1@101.548,81.414 ; 101.177,81.182 ccw(c101.082,81.745) v1@101.548,81.414 ; 101.193,79.828 ccw(c101.052,80.381) v1@101.543,80.089 ; 101.193,79.828 ccw(c101.052,80.381) v1@101.543,80.089 ; 101.193,79.828 ccw(c101.052,80.381) v1@101.543,80.089 ; 101.193,79.828 ccw(c101.052,80.381) v1@101.543,80.089 ; 101.193,79.828 ccw(c101.052,80.381) v1@101.543,80.089 ; 101.193,79.828 ccw(c101.052,80.381) v1@101.543,80.089 ; 101.196,79.822 ccw(c101.048,80.374) v1@101.543,80.088 ; 101.196,79.822 ccw(c101.048,80.374) v1@101.543,80.088 ; 101.196,79.822 ccw(c101.048,80.374) v1@101.543,80.088 ; 101.231,79.893 cw(c101.476,79.467) v1@101.603,79.942 ; 101.231,79.893 cw(c101.476,79.467) v1@101.603,79.942 ; 101.231,79.893 cw(c101.476,79.467) v1@101.603,79.942 ; 101.346,79.113 cw(c102.554,79.113) v1@101.7,79.967 ; 101.346,79.113 cw(c102.554,79.113) v1@101.7,79.967 ; 101.346,79.113 cw(c102.554,79.113) v1@101.7,79.967 ; 101.346,79.64 ccw(c102.554,79.64) v1@101.7,78.785 ; 101.346,79.64 ccw(c102.554,79.64) v1@101.7,78.785 ; 101.346,79.64 ccw(c102.554,79.64) v1@101.7,78.785 ; v1@101.346,79.959 101.397,80.01 101.397,80.747 ; 101.347,79.108 cw(c100.958,78.69) v1@101.529,78.711 ; 101.347,79.108 cw(c100.958,78.69) v1@101.529,78.711 ; 101.347,79.108 cw(c100.958,78.69) v1@101.529,78.711 ; 101.397,80.704 cw(c102.103,80.704) v1@101.688,81.275 ; 101.397,80.704 cw(c102.103,80.704) v1@101.688,81.275 ; 101.397,80.704 cw(c102.103,80.704) v1@101.688,81.275 ; 101.397,80.747 ccw(c100.996,81.147) v1@101.534,81.325 ; 101.397,80.747 ccw(c102.218,80.747) v1@101.693,80.115 ; 101.397,80.747 ccw(c100.996,81.147) v1@101.534,81.325 ; 101.397,80.747 ccw(c102.218,80.747) v1@101.693,80.115 ; 101.397,80.747 ccw(c100.996,81.147) v1@101.534,81.325 ; 101.397,80.747 ccw(c102.218,80.747) v1@101.693,80.115 ; 101.451,79.588 ccw(c100.972,79.899) v1@101.531,80.018 ; 101.451,79.588 ccw(c100.972,79.899) v1@101.531,80.018 ; 101.451,79.588 ccw(c100.972,79.899) v1@101.531,80.018 ; 101.467,80.434 cw(c101.108,80.18) v1@101.533,80.064 ; 101.467,80.434 cw(c101.108,80.18) v1@101.533,80.064 ; 101.467,80.434 cw(c101.108,80.18) v1@101.533,80.064 ; 101.471,81.007 ccw(c101.2,81.226) v1@101.533,81.327 ; 101.471,81.007 ccw(c101.2,81.226) v1@101.533,81.327 ; 101.471,81.007 ccw(c101.2,81.226) v1@101.533,81.327 ; 101.476,79.174 cw(c100.981,78.888) v1@101.533,78.74 ; 101.476,79.174 cw(c100.981,78.888) v1@101.533,78.74 ; 101.476,79.174 cw(c100.981,78.888) v1@101.533,78.74 ; 101.476,79.579 ccw(c100.981,79.864) v1@101.533,80.012 ; 101.476,79.579 ccw(c100.981,79.864) v1@101.533,80.012 ; 101.476,79.579 ccw(c100.981,79.864) v1@101.533,80.012 ; v1@101.655,81.453 ccw(c101.803,82.005) 102.089,81.51 ; v1@101.655,81.453 ccw(c101.803,82.005) 102.089,81.51 ; v1@101.655,81.453 ccw(c101.803,82.005) 102.089,81.51 ; v1@101.7,81.285 cw(c102.79,80.195) 102.79,81.737 ; v1@101.7,81.285 cw(c102.79,80.195) 102.79,81.737 ; v1@101.7,81.285 cw(c102.79,80.195) 102.79,81.737 ; 101.963,81.737 cw(c101.963,80.195) v1@103.053,81.285 ; 101.963,81.737 cw(c101.963,80.195) v1@103.053,81.285 ; 101.963,81.737 cw(c101.963,80.195) v1@103.053,81.285 ; 102.665,81.51 ccw(c102.95,82.005) v1@103.098,81.453 ; 102.665,81.51 ccw(c102.95,82.005) v1@103.098,81.453 ; 102.665,81.51 ccw(c102.95,82.005) v1@103.098,81.453 ; v1@103.124,81.456 ccw(c103.124,81.917) 103.475,81.618 ; v1@103.124,81.456 ccw(c103.124,81.917) 103.475,81.618 ; v1@103.124,81.456 ccw(c103.124,81.917) 103.475,81.618 ; v1@103.214,81.313 cw(c103.886,80.993) 103.886,81.737 ; v1@103.214,81.313 cw(c103.886,80.993) 103.886,81.737 ; v1@103.214,81.313 cw(c103.886,80.993) 103.886,81.737 ; 103.886,81.737 104.47,82.321 ; 104.094,79.38 ccw(c103.49,79.985) v1@104.345,79.985 ; 104.094,79.38 ccw(c103.49,79.985) v1@104.345,79.985 ; 104.094,79.38 ccw(c103.49,79.985) v1@104.345,79.985 ; 104.229,79.551 cw(c104.78,79.403) v1@104.495,79.898 ; 104.229,79.551 cw(c104.78,79.403) v1@104.495,79.898 ; 104.229,79.551 cw(c104.78,79.403) v1@104.495,79.898 ; 104.242,77.267 104.47,77.038 ; 104.242,77.267 104.242,79.527 ; 104.242,78.059 cw(c105.177,78.059) v1@104.516,78.72 ; 104.242,78.059 cw(c105.177,78.059) v1@104.516,78.72 ; 104.242,78.059 cw(c105.177,78.059) v1@104.516,78.72 ; 104.242,79.253 cw(c105.177,79.253) v1@104.516,79.914 ; 104.242,79.253 cw(c105.177,79.253) v1@104.516,79.914 ; 104.242,79.253 cw(c105.177,79.253) v1@104.516,79.914 ; 104.242,79.484 cw(c104.706,79.484) v1@104.491,79.896 ; 104.242,79.484 cw(c104.706,79.484) v1@104.491,79.896 ; 104.242,79.484 cw(c104.706,79.484) v1@104.491,79.896 ; 104.242,79.484 cw(c104.706,79.484) v1@104.491,79.896 ; 104.242,79.484 cw(c104.706,79.484) v1@104.491,79.896 ; 104.242,79.484 cw(c104.706,79.484) v1@104.491,79.896 ; 104.242,79.523 ccw(c105.177,79.523) v1@104.516,78.862 ; 104.242,79.523 ccw(c105.177,79.523) v1@104.516,78.862 ; 104.242,79.523 ccw(c105.177,79.523) v1@104.516,78.862 ; 104.242,79.527 ccw(c103.938,79.831) v1@104.349,79.956 ; 104.242,79.527 ccw(c103.938,79.831) v1@104.349,79.956 ; 104.242,79.527 ccw(c103.938,79.831) v1@104.349,79.956 ; 104.242,79.527 104.391,79.527 104.391,80.366 ; 104.242,79.527 104.242,80.518 ; 104.242,80.518 ccw(c104.762,80.518) v1@104.496,80.071 ; 104.242,80.518 ccw(c104.762,80.518) v1@104.496,80.071 ; 104.242,80.518 ccw(c104.762,80.518) v1@104.496,80.071 ; 104.242,80.518 ccw(c104.762,80.518) v1@104.496,80.071 ; 104.242,80.518 ccw(c104.762,80.518) v1@104.496,80.071 ; 104.242,80.518 ccw(c104.762,80.518) v1@104.496,80.071 ; 104.242,80.518 104.391,80.667 ; 104.242,80.518 104.242,80.772 ; 104.242,80.572 cw(c105.178,80.572) v1@104.516,81.235 ; 104.242,80.572 cw(c105.178,80.572) v1@104.516,81.235 ; 104.242,80.572 cw(c105.178,80.572) v1@104.516,81.235 ; 104.242,80.717 ccw(c105.177,80.717) v1@104.516,80.055 ; 104.242,80.717 ccw(c105.177,80.717) v1@104.516,80.055 ; 104.242,80.717 ccw(c105.177,80.717) v1@104.516,80.055 ; 104.242,80.734 cw(c104.83,80.734) v1@104.501,81.222 ; 104.242,80.734 cw(c104.83,80.734) v1@104.501,81.222 ; 104.242,80.734 cw(c104.83,80.734) v1@104.501,81.222 ; 104.242,80.772 ccw(c103.906,81.107) v1@104.351,81.271 ; 104.242,80.772 ccw(c103.906,81.107) v1@104.351,81.271 ; 104.242,80.772 ccw(c103.906,81.107) v1@104.351,81.271 ; 104.242,80.772 104.391,80.921 ; 104.301,78.349 ccw(c103.848,78.611) v1@104.349,78.762 ; 104.301,78.349 ccw(c103.848,78.611) v1@104.349,78.762 ; 104.301,78.349 ccw(c103.848,78.611) v1@104.349,78.762 ; 104.301,79.232 cw(c103.848,78.971) v1@104.349,78.82 ; 104.301,79.232 cw(c103.848,78.971) v1@104.349,78.82 ; 104.301,79.232 cw(c103.848,78.971) v1@104.349,78.82 ; 104.301,79.543 ccw(c103.848,79.804) v1@104.349,79.956 ; 104.301,79.543 ccw(c103.848,79.804) v1@104.349,79.956 ; 104.301,79.543 ccw(c103.848,79.804) v1@104.349,79.956 ; 104.301,80.426 cw(c103.848,80.165) v1@104.349,80.014 ; 104.301,80.426 cw(c103.848,80.165) v1@104.349,80.014 ; 104.301,80.426 cw(c103.848,80.165) v1@104.349,80.014 ; 104.301,80.863 ccw(c103.847,81.125) v1@104.349,81.277 ; 104.301,80.863 ccw(c103.847,81.125) v1@104.349,81.277 ; 104.301,80.863 ccw(c103.847,81.125) v1@104.349,81.277 ; 104.391,79.613 cw(c104.817,79.613) v1@104.516,79.914 ; 104.391,79.613 cw(c104.817,79.613) v1@104.516,79.914 ; 104.391,79.613 cw(c104.817,79.613) v1@104.516,79.914 ; 104.391,80.356 ccw(c104.817,80.356) v1@104.516,80.055 ; 104.391,80.356 ccw(c104.817,80.356) v1@104.516,80.055 ; 104.391,80.356 ccw(c104.817,80.356) v1@104.516,80.055 ; 104.391,80.356 ccw(c104.817,80.356) v1@104.516,80.055 ; 104.391,80.356 ccw(c104.817,80.356) v1@104.516,80.055 ; 104.391,80.356 ccw(c104.817,80.356) v1@104.516,80.055 ; 104.391,80.356 ccw(c104.817,80.356) v1@104.516,80.055 ; 104.391,80.356 ccw(c104.817,80.356) v1@104.516,80.055 ; 104.391,80.356 ccw(c104.817,80.356) v1@104.516,80.055 ; 104.391,80.366 104.391,80.667 ; 104.391,80.366 104.47,80.366 ; 104.391,80.667 104.391,80.921 ; 104.391,80.667 104.47,80.747 ; 104.391,80.921 v1@104.47,81.001 ; 104.391,80.921 104.391,81.632 104.47,81.712 ; 104.391,80.933 cw(c104.818,80.933) v1@104.516,81.235 ; 104.391,80.933 cw(c104.818,80.933) v1@104.516,81.235 ; 104.391,80.933 cw(c104.818,80.933) v1@104.516,81.235 ; 104.391,80.933 cw(c104.818,80.933) v1@104.516,81.235 ; 104.391,80.933 cw(c104.818,80.933) v1@104.516,81.235 ; 104.391,80.933 cw(c104.818,80.933) v1@104.516,81.235 ; 104.391,80.933 cw(c104.818,80.933) v1@104.516,81.235 ; 104.391,80.933 cw(c104.818,80.933) v1@104.516,81.235 ; 104.391,80.933 cw(c104.818,80.933) v1@104.516,81.235 ; v1@104.395,80.071 ccw(c104.109,80.566) 104.661,80.418 ; v1@104.395,80.071 ccw(c104.109,80.566) 104.661,80.418 ; v1@104.395,80.071 ccw(c104.109,80.566) 104.661,80.418 ; v1@104.395,81.392 ccw(c104.11,81.887) 104.661,81.739 ; v1@104.395,81.392 ccw(c104.11,81.887) 104.661,81.739 ; v1@104.395,81.392 ccw(c104.11,81.887) 104.661,81.739 ; v1@104.445,81.405 ccw(c104.445,81.83) 104.745,81.53 ; v1@104.445,81.405 ccw(c104.445,83.056) v1@105.613,81.889 ; v1@104.445,81.405 ccw(c104.445,81.83) 104.745,81.53 ; v1@104.445,81.405 ccw(c104.445,83.056) v1@105.613,81.889 ; v1@104.445,81.405 ccw(c104.445,81.83) 104.745,81.53 ; v1@104.445,81.405 ccw(c104.445,83.056) v1@105.613,81.889 ; 104.47,77.038 104.47,80.366 ; 104.47,80.366 104.47,80.747 ; 104.47,80.366 104.572,80.366 ; 104.47,80.747 v1@104.47,81.001 ; 104.47,80.747 106.248,82.525 v1@106.731,82.525 ; v1@104.47,81.001 104.496,81.026 104.496,81.28 105.994,82.779 ; v1@104.47,81.001 104.47,81.712 ; 104.47,81.712 104.47,82.321 ; 104.47,81.712 105.537,82.779 ; 104.47,82.321 104.496,82.347 ; 104.496,82.347 104.826,82.677 ; v1@104.531,80.036 cw(c104.763,80.174) 104.572,80.366 ; v1@104.531,80.036 cw(c104.763,80.174) 104.572,80.366 ; v1@104.531,80.036 cw(c104.763,80.174) 104.572,80.366 ; v1@104.532,81.255 cw(c105.026,80.97) 104.879,81.522 ; v1@104.532,81.255 cw(c105.026,80.97) 104.879,81.522 ; v1@104.532,81.255 cw(c105.026,80.97) 104.879,81.522 ; v1@104.545,79.985 cw(c105.399,79.985) 104.795,80.589 ; v1@104.545,79.985 cw(c105.399,79.985) 104.795,80.589 ; v1@104.545,79.985 cw(c105.399,79.985) 104.795,80.589 ; v1@104.545,81.305 cw(c105.707,81.305) 104.886,82.127 ; v1@104.545,81.305 cw(c105.707,81.305) 104.886,82.127 ; v1@104.545,81.305 cw(c105.707,81.305) 104.886,82.127 ; 104.572,80.366 v1@106.731,82.525 ; 104.635,73.948 ccw(c105.028,74.175) v11@105.105,73.727 ; 104.635,73.948 ccw(c105.028,74.175) v11@105.105,73.727 ; 104.635,73.948 ccw(c105.028,74.175) v11@105.105,73.727 ; 104.638,74.197 cw(c105.089,73.937) v11@105.148,74.454 ; 104.638,74.197 cw(c105.089,73.937) v11@105.148,74.454 ; 104.638,74.197 cw(c105.089,73.937) v11@105.148,74.454 ; 104.638,75.307 ccw(c105.089,75.568) v11@105.148,75.05 ; 104.638,75.307 ccw(c105.089,75.568) v11@105.148,75.05 ; 104.638,75.307 ccw(c105.089,75.568) v11@105.148,75.05 ; 104.648,72.147 cw(c105.772,72.147) v11@105.286,73.161 ; 104.648,72.147 cw(c105.772,72.147) v11@105.286,73.161 ; 104.648,72.147 cw(c105.772,72.147) v11@105.286,73.161 ; 104.648,72.74 cw(c107.193,72.74) v11@105.394,74.54 ; 104.648,72.74 cw(c107.193,72.74) v11@105.394,74.54 ; 104.648,72.74 cw(c107.193,72.74) v11@105.394,74.54 ; 104.648,72.942 cw(c105.391,72.942) v11@105.069,73.612 ; 104.648,72.942 cw(c105.391,72.942) v11@105.069,73.612 ; 104.648,72.942 cw(c105.391,72.942) v11@105.069,73.612 ; 104.648,73.655 ccw(c106.624,73.655) v1@105.227,72.258 ; 104.648,73.655 ccw(c106.624,73.655) v1@105.227,72.258 ; 104.648,73.655 ccw(c106.624,73.655) v1@105.227,72.258 ; 104.648,73.656 ccw(c105.205,73.805) v11@105.13,73.233 ; 104.648,73.656 ccw(c105.205,73.805) v11@105.13,73.233 ; 104.648,73.656 ccw(c105.205,73.805) v11@105.13,73.233 ; 104.648,73.947 cw(c105.986,73.947) v11@105.04,74.894 ; 104.648,73.947 cw(c105.986,73.947) v11@105.04,74.894 ; 104.648,73.947 cw(c105.986,73.947) v11@105.04,74.894 ; 104.648,74.175 ccw(c105.9,74.175) v11@105.015,73.29 ; 104.648,74.175 ccw(c105.9,74.175) v11@105.015,73.29 ; 104.648,74.175 ccw(c105.9,74.175) v11@105.015,73.29 ; 104.648,75.382 ccw(c107.107,75.382) v11@105.368,73.644 ; 104.648,75.382 ccw(c107.107,75.382) v11@105.368,73.644 ; 104.648,75.382 ccw(c107.107,75.382) v11@105.368,73.644 ; 104.648,75.557 ccw(c105.986,75.557) v11@105.04,74.611 ; 104.648,75.557 ccw(c105.986,75.557) v11@105.04,74.611 ; 104.648,75.557 ccw(c105.986,75.557) v11@105.04,74.611 ; 104.648,76.764 ccw(c107.193,76.764) v11@105.394,74.964 ; 104.648,76.764 ccw(c107.193,76.764) v11@105.394,74.964 ; 104.648,76.764 ccw(c107.193,76.764) v11@105.394,74.964 ; 104.662,75.279 ccw(c105.689,75.417) v11@105.06,74.593 ; 104.662,75.279 ccw(c105.689,75.417) v11@105.06,74.593 ; 104.662,75.279 ccw(c105.689,75.417) v11@105.06,74.593 ; 104.662,75.279 ccw(c105.689,75.417) v11@105.06,74.593 ; 104.662,75.279 ccw(c105.689,75.417) v11@105.06,74.593 ; 104.662,75.279 ccw(c105.689,75.417) v11@105.06,74.593 ; 104.684,72.997 cw(c105.578,72.87) v11@105.036,73.591 ; 104.684,72.997 cw(c105.578,72.87) v11@105.036,73.591 ; 104.684,72.997 cw(c105.578,72.87) v11@105.036,73.591 ; v1@104.723,81.508 cw(c105.588,80.643) v1@105.588,81.866 ; v1@104.723,81.508 cw(c105.588,80.643) v1@105.588,81.866 ; v1@104.723,81.508 cw(c105.588,80.643) v1@105.588,81.866 ; 104.81,72.753 ccw(c104.54,73.068) v11@104.898,73.279 ; 104.81,72.753 ccw(c104.54,73.068) v11@104.898,73.279 ; 104.81,72.753 ccw(c104.54,73.068) v11@104.898,73.279 ; v11@104.815,74.601 cw(c103.792,74.01) v11@104.88,73.549 ; v11@104.815,74.601 cw(c103.792,74.01) v11@104.88,73.549 ; v11@104.815,74.601 cw(c103.792,74.01) v11@104.88,73.549 ; v11@104.818,73.544 ccw(c103.716,74.18) v11@104.902,74.643 ; v11@104.818,73.544 ccw(c103.716,74.18) v11@104.902,74.643 ; v11@104.818,73.544 ccw(c103.716,74.18) v11@104.902,74.643 ; 104.818,75.96 cw(c103.716,75.324) v11@104.902,74.861 ; 104.818,75.96 cw(c103.716,75.324) v11@104.902,74.861 ; 104.818,75.96 cw(c103.716,75.324) v11@104.902,74.861 ; 104.826,82.677 104.928,82.779 105.537,82.779 ; 105.002,72.646 cw(c104.508,72.361) v1@105.059,72.213 ; 105.002,72.646 cw(c104.508,72.361) v1@105.059,72.213 ; 105.002,72.646 cw(c104.508,72.361) v1@105.059,72.213 ; 105.004,80.798 ccw(c103.836,81.966) v1@105.488,81.966 ; 105.004,80.798 ccw(c103.836,81.966) v1@105.488,81.966 ; 105.004,80.798 ccw(c103.836,81.966) v1@105.488,81.966 ; 105.154,81.75 ccw(c105.007,82.301) v1@105.501,82.016 ; 105.154,81.75 ccw(c105.007,82.301) v1@105.501,82.016 ; 105.154,81.75 ccw(c105.007,82.301) v1@105.501,82.016 ; 105.253,81.681 ccw(c104.998,82.124) v1@105.491,81.992 ; 105.253,81.681 ccw(c104.998,82.124) v1@105.491,81.992 ; 105.253,81.681 ccw(c104.998,82.124) v1@105.491,81.992 ; 105.253,81.681 ccw(c104.998,82.124) v1@105.491,81.992 ; 105.253,81.681 ccw(c104.998,82.124) v1@105.491,81.992 ; 105.253,81.681 ccw(c104.998,82.124) v1@105.491,81.992 ; v11@105.255,73.839 cw(c105.721,74.11) v11@105.374,74.523 ; v11@105.255,73.839 cw(c105.721,74.11) v11@105.374,74.523 ; v11@105.255,73.839 cw(c105.721,74.11) v11@105.374,74.523 ; v11@105.255,73.839 cw(c105.721,74.11) v11@105.374,74.523 ; v11@105.255,73.839 cw(c105.721,74.11) v11@105.374,74.523 ; v11@105.255,73.839 cw(c105.721,74.11) v11@105.374,74.523 ; v11@105.293,74.37 ccw(c105.821,74.058) v11@105.374,73.637 ; v11@105.293,74.37 ccw(c105.821,74.058) v11@105.374,73.637 ; v11@105.293,74.37 ccw(c105.821,74.058) v11@105.374,73.637 ; 105.345,81.622 ccw(c105.001,81.966) v1@105.488,81.966 ; 105.345,81.622 ccw(c105.001,81.966) v1@105.488,81.966 ; 105.345,81.622 ccw(c105.001,81.966) v1@105.488,81.966 ; 105.372,81.532 cw(c105.923,81.385) v1@105.638,81.879 ; 105.372,81.532 cw(c105.923,81.385) v1@105.638,81.879 ; 105.372,81.532 cw(c105.923,81.385) v1@105.638,81.879 ; v1@105.533,82.049 ccw(c105.218,82.526) 105.778,82.411 ; v1@105.533,82.049 ccw(c105.218,82.526) 105.778,82.411 ; v1@105.533,82.049 ccw(c105.218,82.526) 105.778,82.411 ; 105.537,82.779 105.994,82.779 ; v1@105.588,82.066 ccw(c105.588,82.553) 105.932,82.208 ; v1@105.588,82.066 ccw(c105.588,82.553) 105.932,82.208 ; v1@105.588,82.066 ccw(c105.588,82.553) 105.932,82.208 ; v1@105.59,82.066 ccw(c105.622,83.633) v1@106.731,82.525 ; v1@105.59,82.066 ccw(c105.622,83.633) v1@106.731,82.525 ; v1@105.59,82.066 ccw(c105.622,83.633) v1@106.731,82.525 ; v1@105.614,81.89 cw(c106.782,80.722) v1@106.782,82.374 ; v1@105.614,81.89 cw(c106.782,80.722) v1@106.782,82.374 ; v1@105.614,81.89 cw(c106.782,80.722) v1@106.782,82.374 ; v1@105.614,82.062 ccw(c105.746,82.555) 106,82.113 ; v1@105.614,82.062 ccw(c105.746,82.555) 106,82.113 ; v1@105.614,82.062 ccw(c105.746,82.555) 106,82.113 ; v1@105.673,81.914 cw(c106.162,81.618) 106.026,82.173 ; v1@105.673,81.914 cw(c106.162,81.618) 106.026,82.173 ; v1@105.673,81.914 cw(c106.162,81.618) 106.026,82.173 ; v1@105.688,81.972 cw(c106.739,82.034) 105.994,82.779 ; v1@105.688,81.972 cw(c106.739,82.034) 105.994,82.779 ; v1@105.688,81.972 cw(c106.739,82.034) 105.994,82.779 ; 106.248,82.779 cw(c106.248,82.325) v1@106.685,82.447 ; 106.248,82.779 cw(c106.248,82.325) v1@106.685,82.447 ; 106.248,82.779 cw(c106.248,82.325) v1@106.685,82.447 ; 106.248,82.779 112.981,82.779 ; 106.348,82.258 ccw(c106.2,82.809) v1@106.695,82.524 ; 106.348,82.258 ccw(c106.2,82.809) v1@106.695,82.524 ; 106.348,82.258 ccw(c106.2,82.809) v1@106.695,82.524 ; 106.393,82.329 cw(c106.632,81.915) v1@106.756,82.377 ; 106.393,82.329 cw(c106.632,81.915) v1@106.756,82.377 ; 106.393,82.329 cw(c106.632,81.915) v1@106.756,82.377 ; 106.393,82.329 cw(c106.632,81.915) v1@106.756,82.377 ; 106.393,82.329 cw(c106.632,81.915) v1@106.756,82.377 ; 106.393,82.329 cw(c106.632,81.915) v1@106.756,82.377 ; 106.418,82.525 cw(c106.418,82.11) v1@106.711,82.403 ; 106.418,82.525 cw(c106.418,82.11) v1@106.711,82.403 ; 106.418,82.525 cw(c106.418,82.11) v1@106.711,82.403 ; 106.437,82.231 cw(c106.782,81.887) v1@106.782,82.374 ; 106.437,82.231 cw(c106.782,81.887) v1@106.782,82.374 ; 106.437,82.231 cw(c106.782,81.887) v1@106.782,82.374 ; v1@106.731,82.525 cw(c106.731,81.004) v1@107.898,81.978 ; v1@106.731,82.525 cw(c106.731,81.004) v1@107.898,81.978 ; v1@106.731,82.525 cw(c106.731,81.004) v1@107.898,81.978 ; v1@106.731,82.525 v1@106.743,82.537 ; v1@106.731,82.525 111.239,82.525 112.727,82.525 ; v1@106.744,82.537 cw(c106.744,81.066) v1@107.897,81.98 ; v1@106.744,82.537 cw(c106.744,81.066) v1@107.897,81.98 ; v1@106.744,82.537 cw(c106.744,81.066) v1@107.897,81.98 ; v1@106.743,82.537 111.252,82.537 112.74,82.537 ; v1@106.807,82.57 ccw(c106.955,83.122) 107.241,82.627 ; v1@106.807,82.57 ccw(c106.955,83.122) 107.241,82.627 ; v1@106.807,82.57 ccw(c106.955,83.122) 107.241,82.627 ; v1@106.832,82.387 cw(c107.04,82.026) 107.148,82.429 ; v1@106.832,82.387 cw(c107.04,82.026) 107.148,82.429 ; v1@106.832,82.387 cw(c107.04,82.026) 107.148,82.429 ; v1@106.832,82.387 cw(c107.04,82.026) 107.148,82.429 ; v1@106.832,82.387 cw(c107.04,82.026) 107.148,82.429 ; v1@106.832,82.387 cw(c107.04,82.026) 107.148,82.429 ; v1@106.852,82.403 cw(c107.176,82.079) 107.176,82.537 ; v1@106.852,82.403 cw(c107.146,82.11) 107.146,82.525 ; v1@106.852,82.403 cw(c107.759,81.497) 107.759,82.779 ; v1@106.852,82.403 cw(c107.176,82.079) 107.176,82.537 ; v1@106.852,82.403 cw(c107.146,82.11) 107.146,82.525 ; v1@106.852,82.403 cw(c107.759,81.497) 107.759,82.779 ; v1@106.852,82.403 cw(c107.176,82.079) 107.176,82.537 ; v1@106.852,82.403 cw(c107.146,82.11) 107.146,82.525 ; v1@106.852,82.403 cw(c107.759,81.497) 107.759,82.779 ; v1@106.907,82.779 cw(c106.907,82.509) 107.167,82.581 ; v1@106.907,82.779 cw(c106.907,82.509) 107.167,82.581 ; v1@106.907,82.779 cw(c106.907,82.509) 107.167,82.581 ; 107.532,82.236 ccw(c107.861,82.703) v1@107.958,82.141 ; 107.532,82.236 ccw(c107.861,82.703) v1@107.958,82.141 ; 107.532,82.236 ccw(c107.861,82.703) v1@107.958,82.141 ; 107.537,82.247 ccw(c107.877,82.706) v1@107.961,82.141 ; 107.537,82.247 ccw(c107.877,82.706) v1@107.961,82.141 ; 107.537,82.247 ccw(c107.877,82.706) v1@107.961,82.141 ; v1@108.001,82.139 ccw(c108.149,82.69) 108.435,82.196 ; v1@108.001,82.139 ccw(c108.149,82.69) 108.435,82.196 ; v1@108.001,82.139 ccw(c108.149,82.69) 108.435,82.196 ; v1@108.001,82.139 ccw(c108.149,82.69) 108.435,82.196 ; v1@108.001,82.139 ccw(c108.149,82.69) 108.435,82.196 ; v1@108.001,82.139 ccw(c108.149,82.69) 108.435,82.196 ; v1@108.046,81.971 cw(c109.412,80.605) 109.412,82.537 ; v1@108.046,81.971 cw(c109.382,80.635) 109.382,82.525 ; v1@108.046,81.971 cw(c109.412,80.605) 109.412,82.537 ; v1@108.046,81.971 cw(c109.382,80.635) 109.382,82.525 ; v1@108.046,81.971 cw(c109.412,80.605) 109.412,82.537 ; v1@108.046,81.971 cw(c109.382,80.635) 109.382,82.525 ; 108.138,82.537 cw(c108.138,80.605) v1@109.504,81.971 ; 108.138,82.537 cw(c108.138,80.605) v1@109.504,81.971 ; 108.138,82.537 cw(c108.138,80.605) v1@109.504,81.971 ; 108.169,82.525 cw(c108.169,80.635) v1@109.504,81.971 ; 108.169,82.525 cw(c108.169,80.635) v1@109.504,81.971 ; 108.169,82.525 cw(c108.169,80.635) v1@109.504,81.971 ; 109.116,82.196 ccw(c109.401,82.69) v1@109.549,82.139 ; 109.116,82.196 ccw(c109.401,82.69) v1@109.549,82.139 ; 109.116,82.196 ccw(c109.401,82.69) v1@109.549,82.139 ; 109.116,82.196 ccw(c109.401,82.69) v1@109.549,82.139 ; 109.116,82.196 ccw(c109.401,82.69) v1@109.549,82.139 ; 109.116,82.196 ccw(c109.401,82.69) v1@109.549,82.139 ; v1@109.601,82.139 ccw(c109.749,82.69) 110.035,82.196 ; v1@109.601,82.139 ccw(c109.749,82.69) 110.035,82.196 ; v1@109.601,82.139 ccw(c109.749,82.69) 110.035,82.196 ; v1@109.601,82.139 ccw(c109.749,82.69) 110.035,82.196 ; v1@109.601,82.139 ccw(c109.749,82.69) 110.035,82.196 ; v1@109.601,82.139 ccw(c109.749,82.69) 110.035,82.196 ; v1@109.646,81.971 cw(c111.012,80.605) 111.012,82.537 ; v1@109.646,81.971 cw(c110.982,80.635) 110.982,82.525 ; v1@109.646,81.971 cw(c111.012,80.605) 111.012,82.537 ; v1@109.646,81.971 cw(c110.982,80.635) 110.982,82.525 ; v1@109.646,81.971 cw(c111.012,80.605) 111.012,82.537 ; v1@109.646,81.971 cw(c110.982,80.635) 110.982,82.525 ; 109.738,82.537 cw(c109.738,80.605) v1@111.104,81.971 ; 109.738,82.537 cw(c109.738,80.605) v1@111.104,81.971 ; 109.738,82.537 cw(c109.738,80.605) v1@111.104,81.971 ; 109.769,82.525 cw(c109.769,80.635) v1@111.104,81.971 ; 109.769,82.525 cw(c109.769,80.635) v1@111.104,81.971 ; 109.769,82.525 cw(c109.769,80.635) v1@111.104,81.971 ; 110.716,82.196 ccw(c111.001,82.69) v1@111.149,82.139 ; 110.716,82.196 ccw(c111.001,82.69) v1@111.149,82.139 ; 110.716,82.196 ccw(c111.001,82.69) v1@111.149,82.139 ; 110.716,82.196 ccw(c111.001,82.69) v1@111.149,82.139 ; 110.716,82.196 ccw(c111.001,82.69) v1@111.149,82.139 ; 110.716,82.196 ccw(c111.001,82.69) v1@111.149,82.139 ; v1@111.201,82.139 ccw(c111.349,82.69) 111.635,82.196 ; v1@111.201,82.139 ccw(c111.349,82.69) 111.635,82.196 ; v1@111.201,82.139 ccw(c111.349,82.69) 111.635,82.196 ; v1@111.201,82.139 ccw(c111.349,82.69) 111.635,82.196 ; v1@111.201,82.139 ccw(c111.349,82.69) 111.635,82.196 ; v1@111.201,82.139 ccw(c111.349,82.69) 111.635,82.196 ; v1@111.246,81.971 cw(c112.612,80.605) 112.612,82.537 ; v1@111.246,81.971 cw(c112.582,80.635) 112.582,82.525 ; v1@111.246,81.971 cw(c112.612,80.605) 112.612,82.537 ; v1@111.246,81.971 cw(c112.582,80.635) 112.582,82.525 ; v1@111.246,81.971 cw(c112.612,80.605) 112.612,82.537 ; v1@111.246,81.971 cw(c112.582,80.635) 112.582,82.525 ; 111.338,82.537 cw(c111.338,80.605) v1@112.704,81.971 ; 111.338,82.537 cw(c111.338,80.605) v1@112.704,81.971 ; 111.338,82.537 cw(c111.338,80.605) v1@112.704,81.971 ; 111.369,82.525 cw(c111.369,80.635) v1@112.704,81.971 ; 111.369,82.525 cw(c111.369,80.635) v1@112.704,81.971 ; 111.369,82.525 cw(c111.369,80.635) v1@112.704,81.971 ; 112.316,82.196 ccw(c112.601,82.69) v1@112.749,82.139 ; 112.316,82.196 ccw(c112.601,82.69) v1@112.749,82.139 ; 112.316,82.196 ccw(c112.601,82.69) v1@112.749,82.139 ; 112.316,82.196 ccw(c112.601,82.69) v1@112.749,82.139 ; 112.316,82.196 ccw(c112.601,82.69) v1@112.749,82.139 ; 112.316,82.196 ccw(c112.601,82.69) v1@112.749,82.139 ; 112.727,82.525 112.74,82.537 ; 112.727,82.525 116.027,82.525 116.205,82.525 ; 112.74,82.537 112.981,82.779 ; 112.74,82.537 114.592,82.537 ; v1@112.801,82.139 ccw(c112.949,82.69) 113.235,82.196 ; v1@112.801,82.139 ccw(c112.949,82.69) 113.235,82.196 ; v1@112.801,82.139 ccw(c112.949,82.69) 113.235,82.196 ; v1@112.801,82.139 ccw(c112.949,82.69) 113.235,82.196 ; v1@112.801,82.139 ccw(c112.949,82.69) 113.235,82.196 ; v1@112.801,82.139 ccw(c112.949,82.69) 113.235,82.196 ; v1@112.846,81.971 cw(c114.182,80.635) 114.182,82.525 ; v1@112.846,81.971 cw(c114.212,80.605) 114.212,82.537 ; v1@112.846,81.971 cw(c114.182,80.635) 114.182,82.525 ; v1@112.846,81.971 cw(c114.212,80.605) 114.212,82.537 ; v1@112.846,81.971 cw(c114.182,80.635) 114.182,82.525 ; v1@112.846,81.971 cw(c114.212,80.605) 114.212,82.537 ; v1@112.865,82.086 cw(c113.409,82.351) 112.981,82.779 ; v1@112.865,82.086 cw(c113.409,82.351) 112.981,82.779 ; v1@112.865,82.086 cw(c113.409,82.351) 112.981,82.779 ; 112.938,82.537 cw(c112.938,80.605) v1@114.304,81.971 ; 112.938,82.537 cw(c112.938,80.605) v1@114.304,81.971 ; 112.938,82.537 cw(c112.938,80.605) v1@114.304,81.971 ; 112.969,82.525 cw(c112.969,80.635) v1@114.304,81.971 ; 112.969,82.525 cw(c112.969,80.635) v1@114.304,81.971 ; 112.969,82.525 cw(c112.969,80.635) v1@114.304,81.971 ; 112.981,82.779 113.538,82.779 ; 112.981,82.779 114.15,83.947 115.875,83.947 116.279,84.351 116.838,84.351 116.894,84.351 116.261,83.718 116.205,83.718 115.646,83.718 114.884,83.718 ; 113.538,82.779 114.198,83.439 ; 113.538,82.779 113.944,82.779 ; 113.916,82.196 ccw(c114.201,82.69) v1@114.349,82.139 ; 113.916,82.196 ccw(c114.201,82.69) v1@114.349,82.139 ; 113.916,82.196 ccw(c114.201,82.69) v1@114.349,82.139 ; 113.916,82.196 ccw(c114.201,82.69) v1@114.349,82.139 ; 113.916,82.196 ccw(c114.201,82.69) v1@114.349,82.139 ; 113.916,82.196 ccw(c114.201,82.69) v1@114.349,82.139 ; 113.944,82.779 cw(c114.962,81.762) v1@115.15,83.187 ; 113.944,82.779 cw(c114.962,81.762) v1@115.15,83.187 ; 113.944,82.779 cw(c114.962,81.762) v1@115.15,83.187 ; 113.944,82.779 114.706,82.779 114.833,82.779 115.265,82.779 116.218,82.779 ; 113.944,82.779 114.884,83.718 ; 114.198,83.439 114.351,83.439 114.63,83.718 ; 114.198,83.439 113.919,83.439 114.198,83.718 114.478,83.718 ; 114.198,83.439 114.478,83.718 ; v1@114.401,82.139 ccw(c114.549,82.69) 114.835,82.196 ; v1@114.401,82.139 ccw(c114.549,82.69) 114.835,82.196 ; v1@114.401,82.139 ccw(c114.549,82.69) 114.835,82.196 ; v1@114.401,82.139 ccw(c114.549,82.69) 114.835,82.196 ; v1@114.401,82.139 ccw(c114.549,82.69) 114.835,82.196 ; v1@114.401,82.139 ccw(c114.549,82.69) 114.835,82.196 ; v1@114.446,81.971 cw(c115.782,80.635) 115.782,82.525 ; v1@114.446,81.971 cw(c115.812,80.605) 115.812,82.537 ; v1@114.446,81.971 cw(c115.782,80.635) 115.782,82.525 ; v1@114.446,81.971 cw(c115.812,80.605) 115.812,82.537 ; v1@114.446,81.971 cw(c115.782,80.635) 115.782,82.525 ; v1@114.446,81.971 cw(c115.812,80.605) 115.812,82.537 ; 114.478,83.718 114.63,83.718 ; 114.478,83.718 114.63,83.871 114.783,83.871 114.63,83.718 ; 114.569,82.525 cw(c114.569,80.635) v1@115.904,81.971 ; 114.569,82.525 cw(c114.569,80.635) v1@115.904,81.971 ; 114.569,82.525 cw(c114.569,80.635) v1@115.904,81.971 ; 114.592,82.537 cw(c114.592,80.733) v1@115.903,81.973